# Altium PCB QTouch.PcbDoc
Units mm, origin at the board's own origin, x right, y up, seen from the top; angles counter-clockwise.
Board outline 69.64 x 63.83 mm, 2 copper layers (Top Layer, Bottom Layer); 28 components, 25 nets, 87 pads, 41 vias.
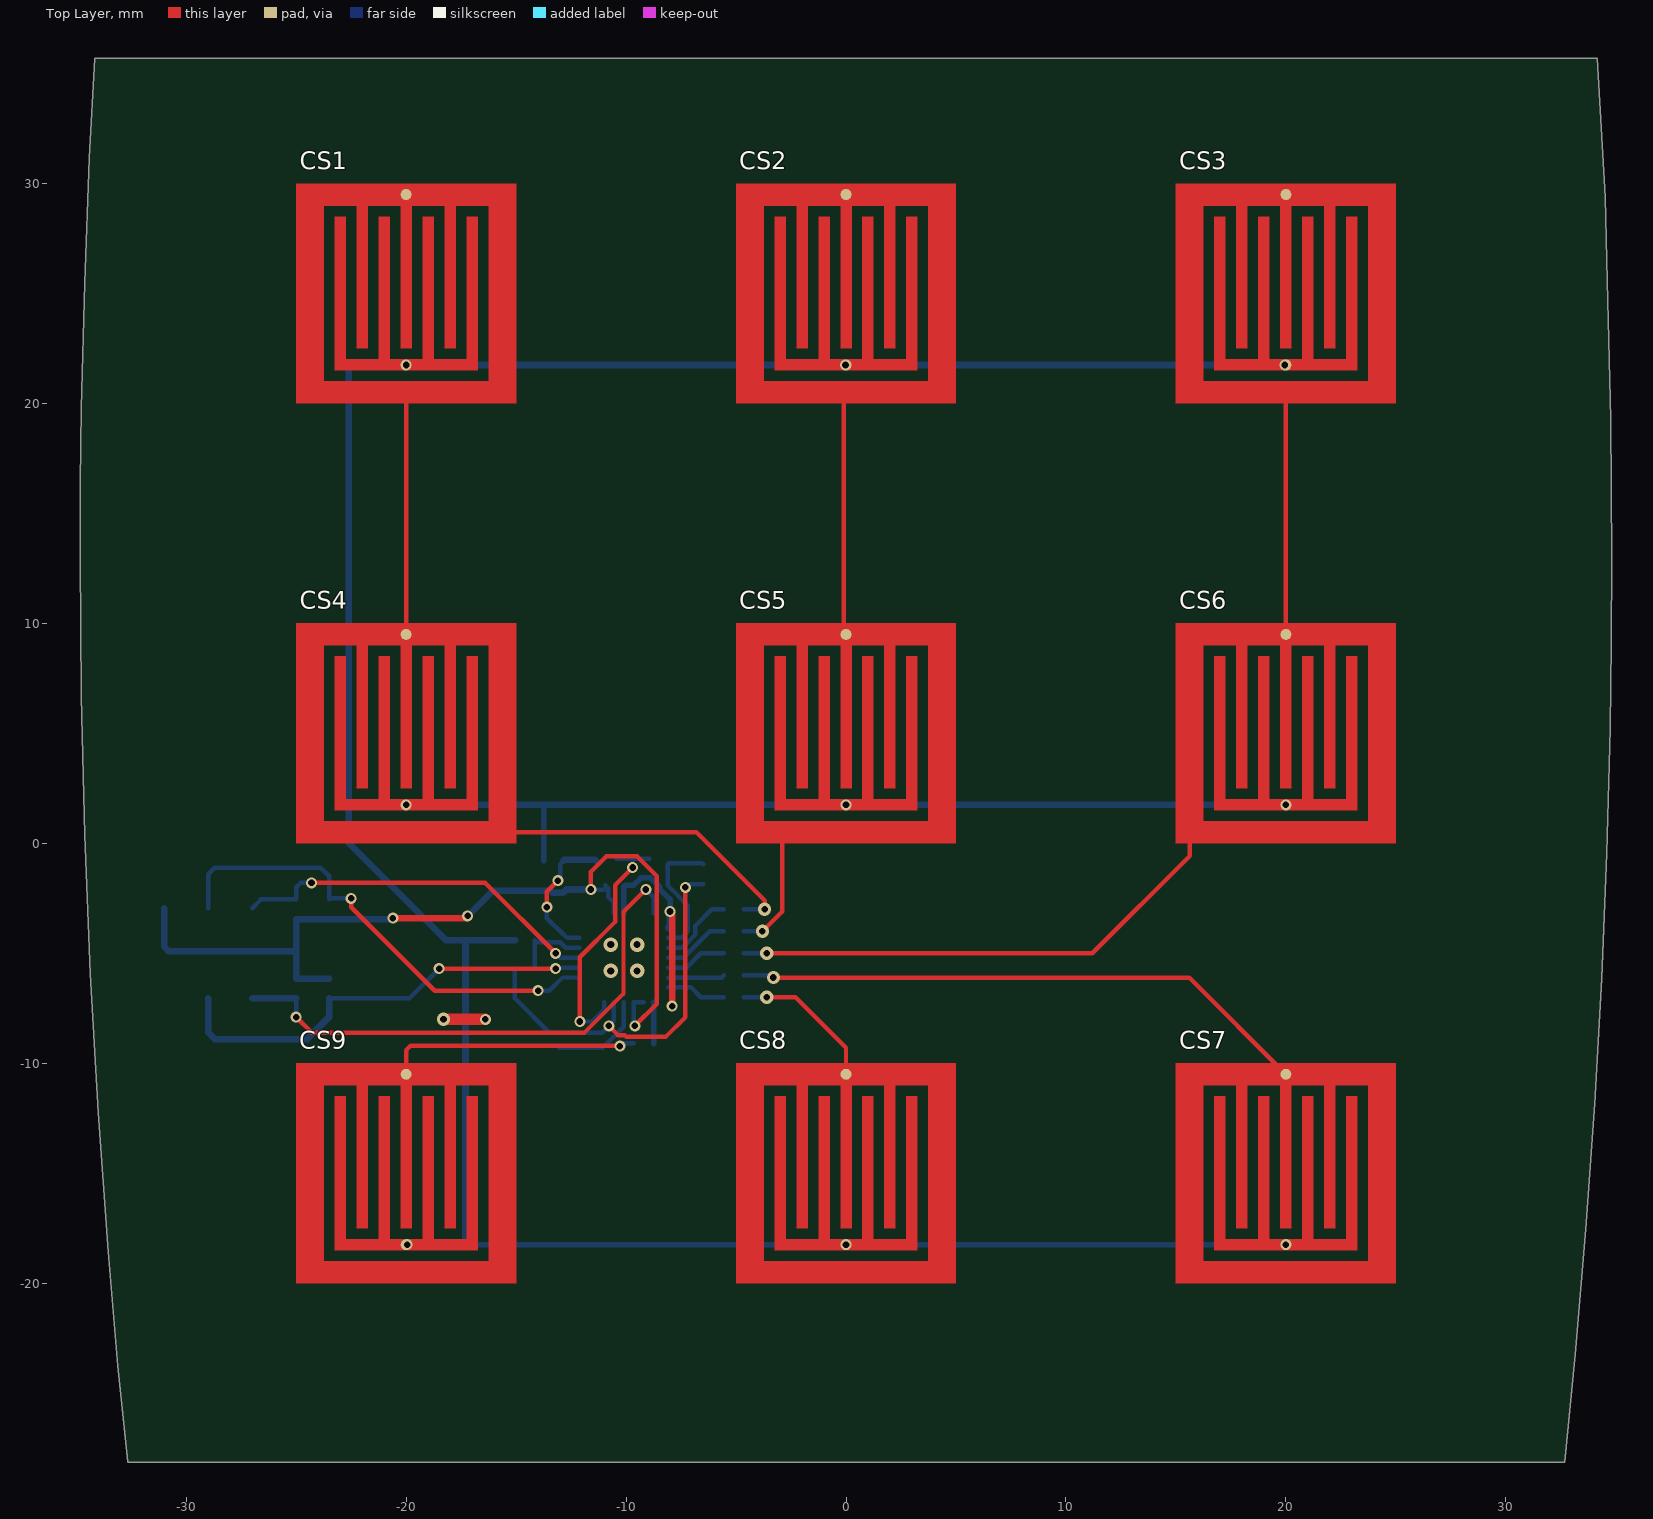
[diagram p0: Top Layer view]
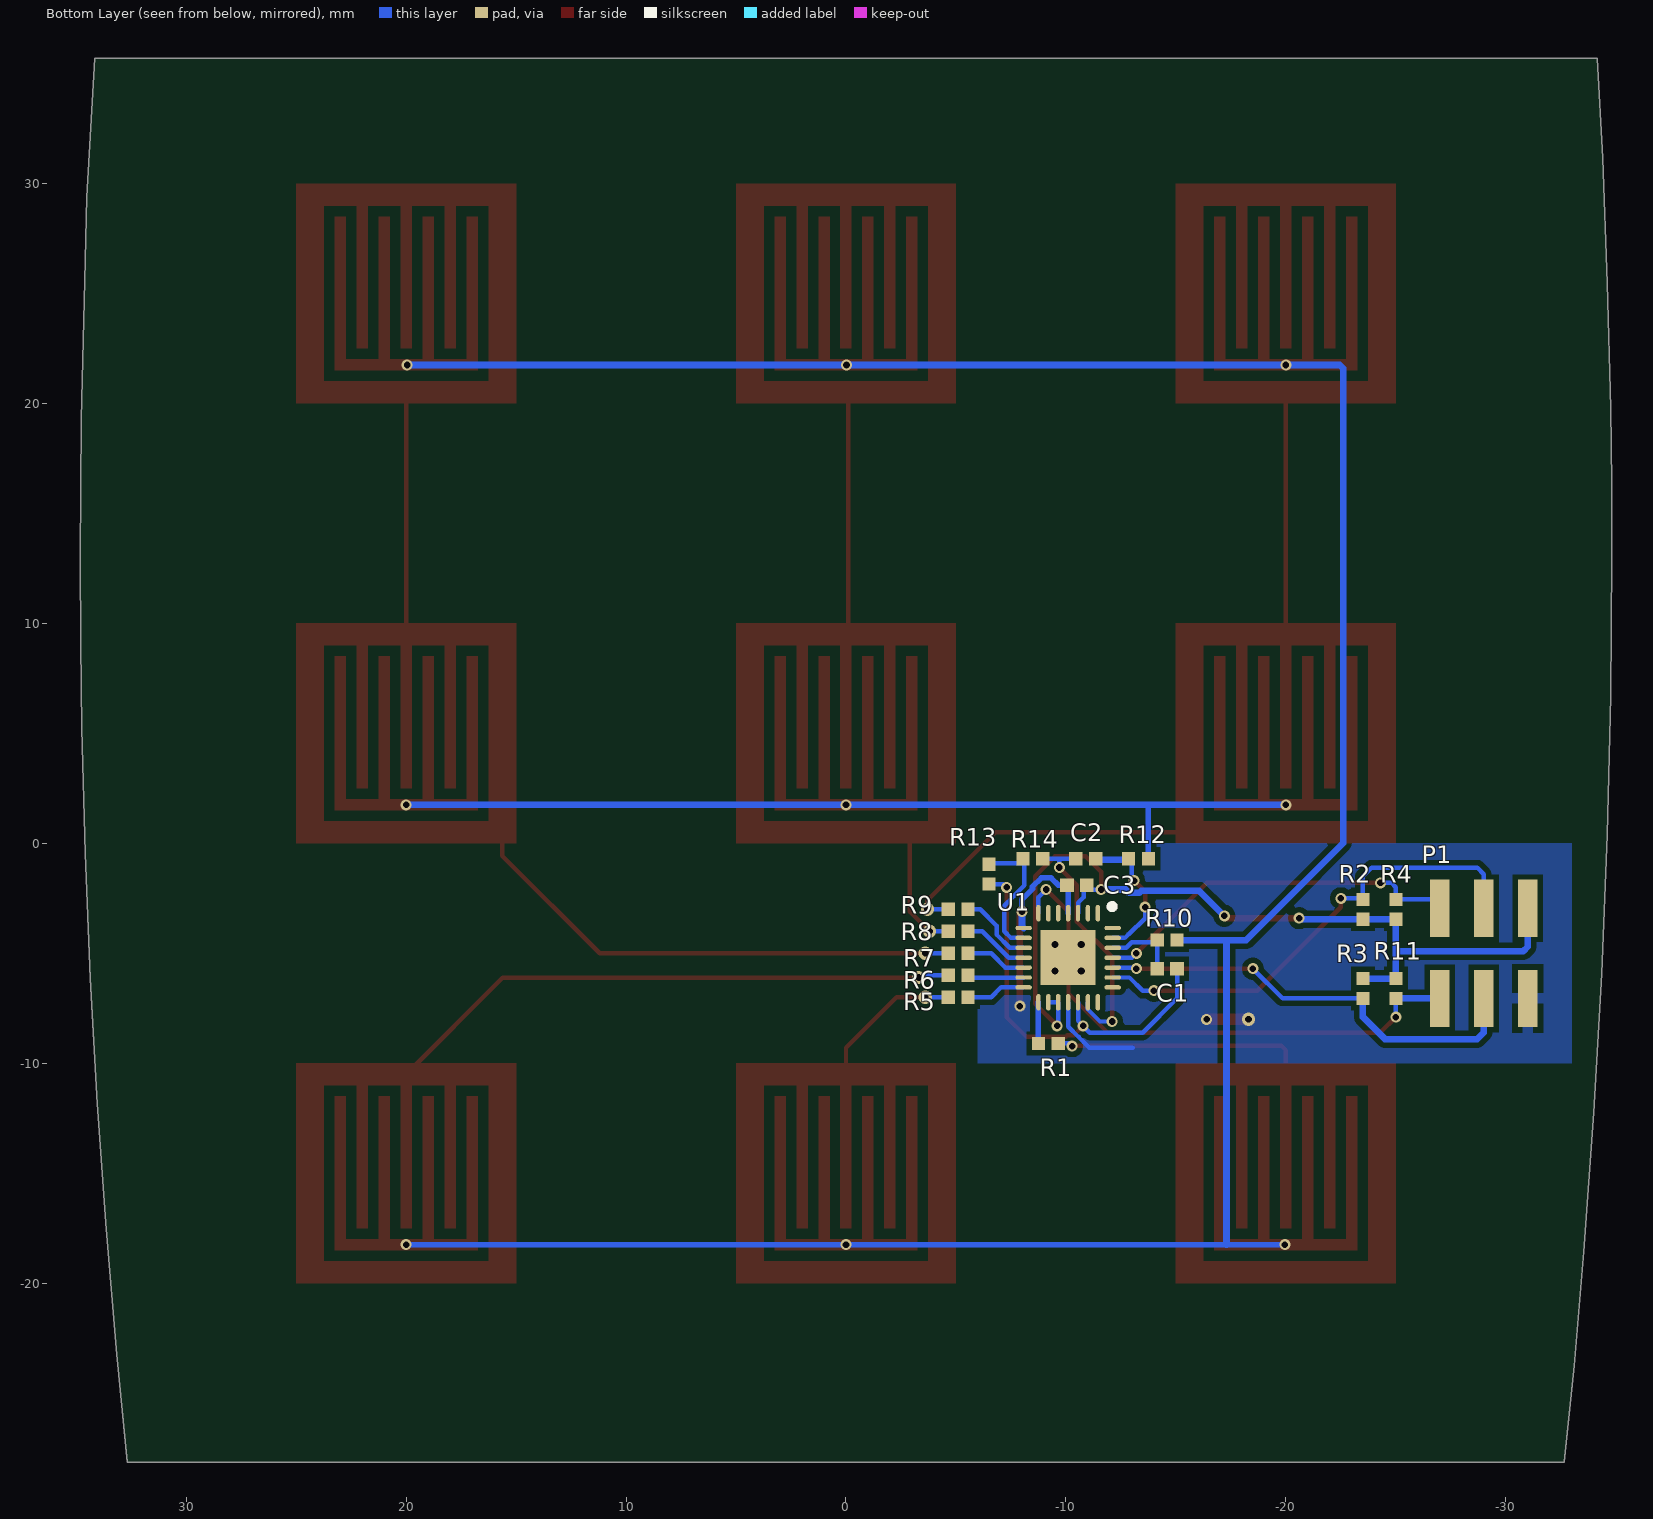
[diagram p1: Bottom Layer view, seen from below]
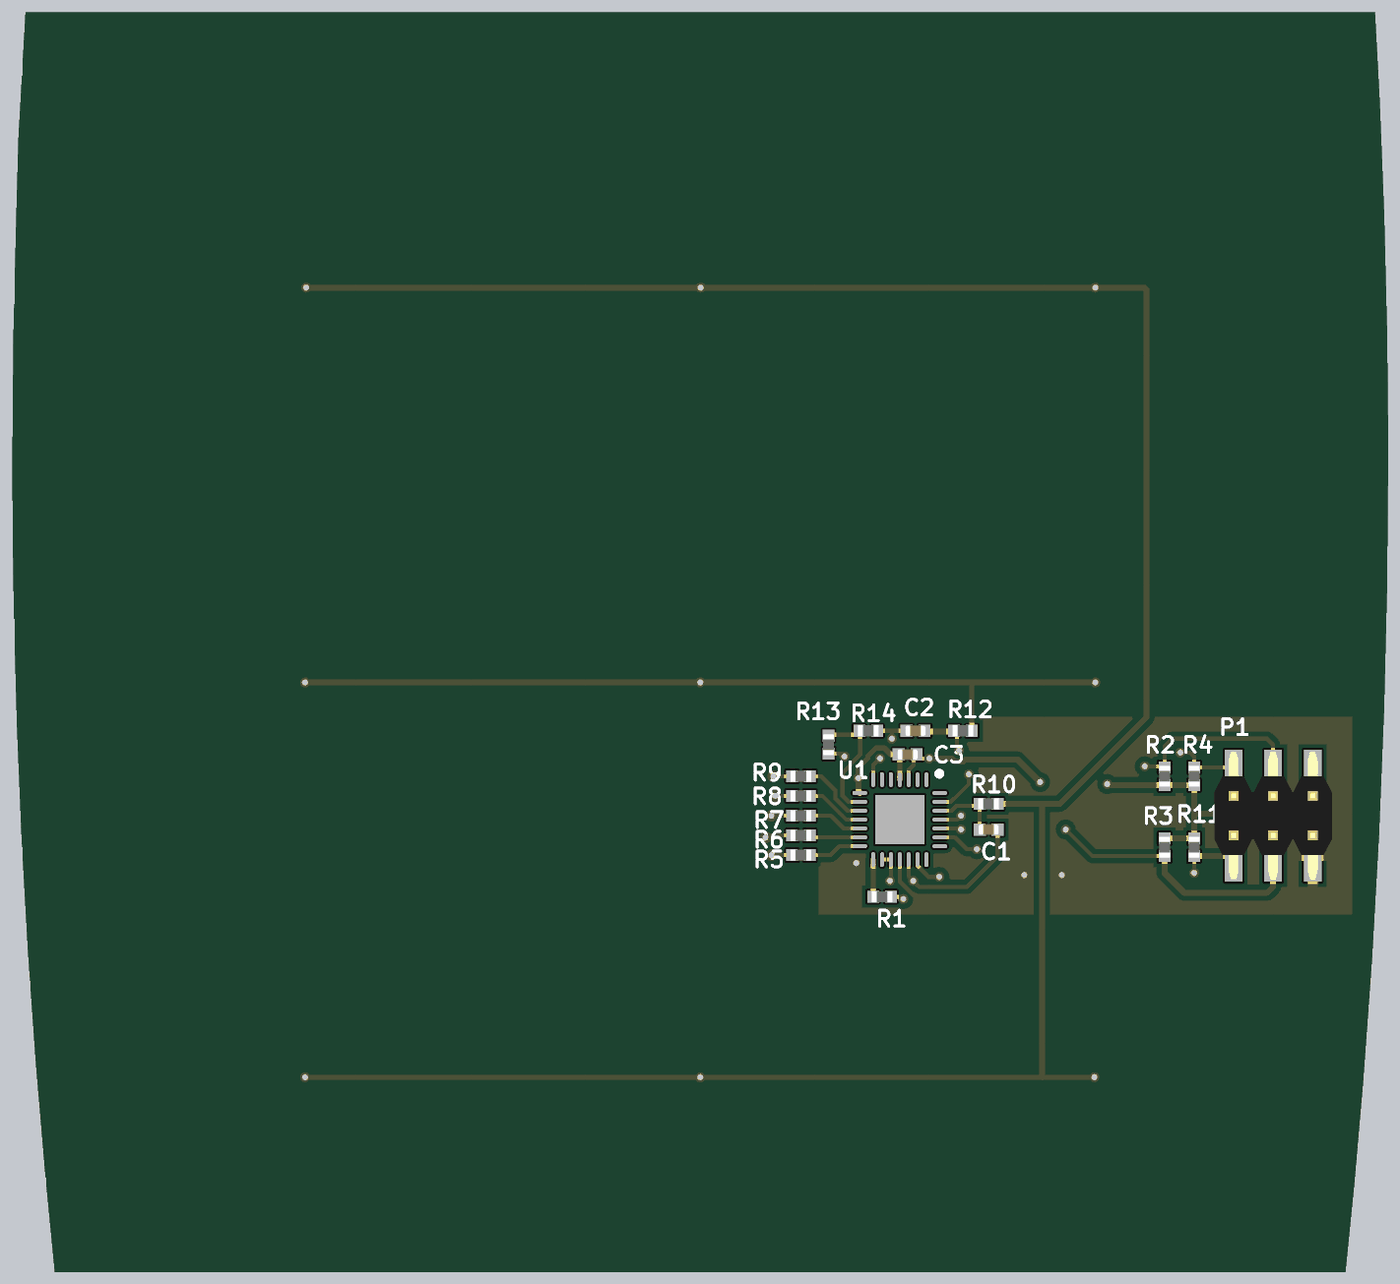
[diagram p2: 3D render of the assembled board from below, using the file's embedded part models]

## Layer stack, top to bottom
Top Layer: signal copper 0.0356
Dielectric: dielectric 0.32, FR-4, Dk 4.8
Bottom Layer: signal copper 0.0356

## Board outline
-34.008,-12.254 -34.364,-5.931 -34.618,0.386 -34.77,6.683 -34.821,12.979 -34.806,16.379 -34.761,19.78 -34.621,25.467 -34.398,31.159 -34.155,35.7 34.155,35.7 34.511,29.378 34.618,25.574 34.77,19.275 34.82,12.979 34.801,9.107 34.744,5.235 34.59,-0.452 34.353,-6.145 34.034,-11.841 33.633,-17.537 33.148,-23.231 32.674,-28.13 -32.664,-28.13 -32.664,-28.106 -33.1,-23.751 -33.55,-18.577

## Design rules (kind name [scope] priority, off if disabled: settings)
Clearance poly [(InPolygon)] p1: gap=0.254
Clearance [All] p2: gap=0.152
DiffPairsRouting [All] p1 off: maxlimit=0.254 minlimit=0.254 mostfreqgap=0.254 maxuncoupledlength=12.7
FanoutControl Fanout_BGA [IsBGA] p1 off: bgadir=Out bgaviamode=Centered fanoutstyle=Auto fanoutdirection=Alternating viagrid=0.025 // Fanout_BGA (Default Rule)
FanoutControl Fanout_LCC [IsLCC] p2 off: bgadir=Out bgaviamode=Centered fanoutstyle=Auto fanoutdirection=Alternating viagrid=0.025 // Fanout_LCC (Default Rule)
FanoutControl Fanout_SOIC [IsSOIC] p3 off: bgadir=Out bgaviamode=Centered fanoutstyle=Auto fanoutdirection=Alternating viagrid=0.025 // Fanout_SOIC (Default Rule)
FanoutControl Fanout_Small [(CompPinCount < 5)] p4 off: bgadir=Out bgaviamode=Centered fanoutstyle=Auto fanoutdirection=OutThenIn viagrid=0.025 // Fanout_Small (Default Rule)
FanoutControl Fanout_Default [All] p5 off: bgadir=Out bgaviamode=Centered fanoutstyle=Auto fanoutdirection=Alternating viagrid=0.025 // Fanout_Default (Default Rule)
HoleSize [All] p1 off: absolutevalues=TRUE maxlimit=2.54 minlimit=0.025 maxpercent=80.000 minpercent=20.000
HoleSize Testpoint [All] p2 off: absolutevalues=TRUE maxlimit=2.54 minlimit=0.025 maxpercent=80.000 minpercent=20.000
HoleSize TestPointUsage [All] p3 off: absolutevalues=TRUE maxlimit=2.54 minlimit=0.025 maxpercent=80.000 minpercent=20.000
LayerPairs [All] p1 off: enforce=TRUE
MinimumSolderMaskSliver [All] p1 off: minsoldermaskwidth=0.254
PolygonConnect PolygonConnect_pad [(InPadClass('All Pads'))] p1: connectstyle=Relief reliefconductorwidth=0.5 reliefentries=4 polygonreliefangle="90 Angle"
PolygonConnect [All] p2: connectstyle=Direct reliefconductorwidth=0.762 reliefentries=4 polygonreliefangle="90 Angle"
RoutingCorners [All] p1 off: cornerstyle=45-Degree minsetback=2.54 maxsetback=2.54
RoutingLayers [All] p1 off: top layer_v5=TRUE bottom layer_v5=TRUE
RoutingPriority [All] p1 off: routingpriority=0
RoutingTopology [All] p1 off: topology=Shortest
RoutingVias [All] p1: holewidth=0.3 width=0.6 viastyle="Through Hole" minholewidth=0.3 minwidth=0.5 maxholewidth=2 maxwidth=3
ShortCircuit [All] p1: allowed=TRUE
SilkToSilkClearance [All] p1 off: silktosilkclearance=0.254
SilkscreenOverComponentPads [All] p1 off: minsilkscreentomaskgap=0.051
SolderMaskExpansion [All] p1: expansion=0.102
ViasUnderSMD ViasUnderSMD_ic35 [(InComponent('IC35'))] p1: allowed=TRUE
ViasUnderSMD [All] p2: allowed=FALSE
Width [All] p1: maxlimit=5.08 minlimit=0.203 preferedwidth=0.203
12 further rules are at their usual default settings.

## Components (designator, comment, footprint, x,y, rotation, side; value= is the part's Value field where it differs from the comment)
C1 "4.7nF" CAPC1005X55N -14.6,-5.7 r0 bottom
C2 "4.7nF" CAPC1005X55N -10.9,-0.7 r180 bottom
C3 "100nF" CAPC1005X55N -10.5,-1.9 r180 bottom
CS1 "QMatrix Button" ? -20,25 r0 top
CS2 "QMatrix Button" ? 0,25 r0 top
CS3 "QMatrix Button" ? 20,25 r0 top
CS4 "QMatrix Button" ? -20,5 r0 top
CS5 "QMatrix Button" ? 0,5 r0 top
CS6 "QMatrix Button" ? 20,5 r0 top
CS7 "QMatrix Button" ? 20,-15 r0 top
CS8 "QMatrix Button" ? 0,-15 r0 top
CS9 "QMatrix Button" ? -20,-15 r0 top
P1 "Header 6" "header 2X3" -29,-5 r0 bottom
R1 "1k" RESC1005X40N -9.2,-9.1 r180 bottom
R2 "10k" RESC1005X40N -23.5,-3 r270 bottom
R3 "10k" RESC1005X40N -23.5,-6.6 r90 bottom
R4 "100k" RESC1005X40N -25,-3 r270 bottom
R5 "1k" RESC1005X40N -5.1,-7 r0 bottom
R6 "1k" RESC1005X40N -5.1,-6 r0 bottom
R7 "1k" RESC1005X40N -5.1,-5 r0 bottom
R8 "1k" RESC1005X40N -5.1,-4 r0 bottom
R9 "1k" RESC1005X40N -5.1,-3 r0 bottom
R10 "1k" RESC1005X40N -14.6,-4.4 r180 bottom
R11 "100k" RESC1005X40N -25,-6.6 r90 bottom
R12 "1k" RESC1005X40N -13.3,-0.7 r180 bottom
R13 "1M" RESC1005X40N -6.5,-1.4 r270 bottom
R14 "1M" RESC1005X40N -8.5,-0.7 r180 bottom
U1 "AT42QT2160-MMU" 28M1_N -10.1,-5.2 r270 bottom

## Footprints (in the part's own frame and the unit in brackets; to place one, negate y for a bottom-side part, rotate by r counter-clockwise, add the part's x,y. Pads: shape width x height; smd on the part's side, far side on the other; paste and mask are expansions set on the pad)
28M1_N [mm] "QFN, 28-Leads, Body 4x4mm, Pitch 0.45mm, IPC Medium Density"
  oval 0.75x0.2 smd: 1(-2.025,1.35) 2(-2.025,0.9) 3(-2.025,0.45) 4(-2.025,0) 5(-2.025,-0.45) 6(-2.025,-0.9) 7(-2.025,-1.35) 15(2.025,-1.35) 16(2.025,-0.9) 17(2.025,-0.45) 18(2.025,0) 19(2.025,0.45) 20(2.025,0.9) 21(2.025,1.35)
  oval 0.2x0.75 smd: 8(-1.35,-2.025) 9(-0.9,-2.025) 10(-0.45,-2.025) 11(0,-2.025) 12(0.45,-2.025) 13(0.9,-2.025) 14(1.35,-2.025) 22(1.35,2.025) 23(0.9,2.025) 24(0.45,2.025) 25(0,2.025) 26(-0.45,2.025) 27(-0.9,2.025) 28(-1.35,2.025)
  rect 2.5x2.5 smd: 29(0,0)
  silkscreen extent -2.45,1.88 -2.2,2.12, body extent -2.02,-2.02 2.02,2.02, height 1
CAPC1005X55N [mm] "Chip Capacitor, Body 1.0x0.55mm, IPC Medium Density"
  rect 0.62x0.62 smd: 1(-0.45,0) 2(0.45,0)
  body extent -0.52,-0.27 0.53,0.28, height 0.55
"header 2X3" [mm]
  rect 0.9x2.6 smd: 1(-2,-2.05) 2(-2,2.05) 3(0,-2.05) 4(0,2.05) 5(2,-2.05) 6(2,2.05)
  body extent -2.97,-3.25 2.98,3.25, height 6.5
RESC1005X40N [mm] "Chip Resistor, EIA 0402, Metric 1005, Body 1.0x0.5mm, IPC Medium Density"
  rect 0.6x0.6 smd: 1(-0.45,0) 2(0.45,0)
  body extent -0.52,-0.27 0.53,0.28, height 0.4
? [mm]
  round 0.5 smd paste-0.25: X(0,4.5) Y(0,-3.25)
  Top Layer region: -3.25,-3.5 -3.25,3.5 -2.75,3.5 -2.75,-3 -1.25,-3 -1.25,3.5 -0.75,3.5 -0.75,-3 0.75,-3 0.75,3.5 1.25,3.5 1.25,-3 2.75,-3 2.75,3.5 3.25,3.5 3.25,-3.5
  Top Layer region: -5,-5 5,-5 5,5 -5,5 -5,-5 -3.75,-4 -3.75,4 -2.25,4 -2.25,-2.5 -1.75,-2.5 -1.75,4 -0.25,4 -0.25,-2.5 0.25,-2.5 0.25,4 1.75,4 1.75,-2.5 2.25,-2.5 2.25,4 3.75,4 3.75,-4 -3.75,-4

## Part data
C1 C2: library part CC0402_4.7NF_16V_10%_X7R, "Non-polarised capacitor"
C3: library part CC0402_100NF_16V_10%_X7R, "Non-polarised capacitor"
CS1 CS2 CS3 CS4 CS5 CS6 CS7 CS8 CS9: library part QMatrixButton
P1: "Header, 6-Pin"
R1 R5 R6 R7 R8 R9 R10 R12: library part R0402_1K_1%_0.0625W_100PPM, "Resistor - 1%"
R2 R3: library part R0402_10K_1%_0.0625W_100PPM, "Resistor - 1%"
R4 R11: library part R0402_100K_1%_0.0625W_100PPM, "Resistor - 1%"
R13 R14: library part R0402_1M_1%_0.0625W_100PPM, "Resistor - 1%"
U1: "QSlide 16-key QMatrix Sensor IC, 28-Pin VQFN"

## Via types
v1: diameter 0.5, hole 0.3, Top Layer to Bottom Layer, tented both sides, 31 vias
v2: diameter 0.6, hole 0.3, Top Layer to Bottom Layer, tented both sides, 6 vias
v3: diameter 0.66, hole 0.33, Top Layer to Bottom Layer, tented both sides, 4 vias

## Nets (pads, with @x,y where several pads share a name; then routed paths per layer and width w, separated by ;. In a path a pad name is that pad's centre, name@x,y a point inside that pad or via, vN(x,y) a via of type N, cw(c..) or ccw(c..) an arc to the next point about the centre after c; other vN are vias at no path point)
\Q\T\_\C\H\A\N\G\E\: P1.6 R11.1 U1.7 | length 25.1
  Top Layer w0.203: v1(-25,-7.9) -24.296,-8.604 -11.891,-8.604 -10.116,-6.829 -10.116,-3.116 v1(-9.1,-2.1)
  Bottom Layer w0.203: v1(-25,-7.9) R11.1 ; v1(-9.1,-2.1) -8.75,-2.45 U1.7
  Bottom Layer w0.3: P1.6 R11.1
GND: C3.1 P1.2 U1.4 U1.8 U1.18 | length 16
  Top Layer w0.3: v1(-8,-3.1) -7.9,-3.2 v1(-7.9,-7.4)
  Top Layer w0.508: v2(-18.3,-8) v1(-16.4,-8)
  Bottom Layer w0.204: -13.039,-9.3 -11.071,-9.3 -10.804,-9.034 -10.575,-8.804 -10.104,-8.334 -10.104,-8.091 -10.1,-8.087 U1.18
  Bottom Layer w0.254: U1.4 -10.1,-1.95 C3.1 -9.649,-1.9 -9.319,-1.571 -8.881,-1.571 -8.481,-1.97 -8.481,-2.071 -8,-2.552 v1(-8,-3.1)
  Bottom Layer w0.3: U1.8 -8,-3.775 v1(-8,-3.1)
NetC1_1: C1.1 R13.2 U1.19 | length 18.4
  Top Layer w0.204: v1(-10.784,-8.3) -10.367,-8.717 -10.07,-8.717 -9.982,-8.804 -8.204,-8.804 -7.3,-7.9 v1(-7.3,-2)
  Bottom Layer w0.204: C1.1 -15.05,-7.05 -13.496,-8.604 -11.088,-8.604 v1(-10.784,-8.3) -10.55,-8.066 U1.19 ; v1(-7.3,-2) -7.15,-1.85 R13.2
NetC1_2: C1.2 R10.1 U1.26 | length 3.5
  Bottom Layer w0.204: C1.2 R10.1 -14.054,-4.496 -12.991,-4.496 -12.737,-4.75 U1.26
NetC2_1: C2.1 R14.2 U1.20 | length 11.5
  Top Layer w0.204: v1(-12.1,-8.1) -12.1,-5.174 -10.5,-3.574 -10.5,-1.9 v1(-9.7,-1.1)
  Bottom Layer w0.204: v1(-12.1,-8.1) -11.549,-8.1 -11,-7.551 U1.20 ; C2.1 -9.7,-0.7 ; v1(-9.7,-1.1) -9.7,-0.7 ; R14.2 -9.7,-0.7
NetC2_2: C2.2 R12.1 U1.27 | length 6.3
  Top Layer w0.203: v1(-13.6,-2.9) -13.6,-2.2 v1(-13.1,-1.7)
  Bottom Layer w0.203: v1(-13.6,-2.9) -13.6,-3.4 -12.86,-4.14 -12.844,-4.14 -12.683,-4.3 U1.27 ; v1(-13.1,-1.7) -13,-1.6 -13,-0.95 R12.1@-12.85,-0.8
  Bottom Layer w0.3: R12.1@-12.85,-0.8 -12.798,-0.748 -11.402,-0.748 C2.2@-11.35,-0.8
NetR1_1: R1.1 U1.15 | length 1.9
  Bottom Layer w0.254: R1.1 U1.15
NetR5_1: R5.1 U1.14 | length 2.7
  Bottom Layer w0.204: U1.14 -7.05,-6.55 -6.6,-7 R5.1
NetR6_1: R6.1 U1.13 | length 2.6
  Bottom Layer w0.204: U1.13 -5.65,-6.1 R6.1
NetR7_1: R7.1 U1.12 | length 2.8
  Bottom Layer w0.204: U1.12 -7.25,-5.65 -6.6,-5 R7.1
NetR8_1: R8.1 U1.11 | length 3
  Bottom Layer w0.203: U1.11 -7.393,-5.2 -6.193,-4 R8.1
NetR9_1: R9.1 U1.10 | length 3.5
  Bottom Layer w0.204: U1.10 -7.447,-4.75 -6.844,-4.147 -6.844,-3.744 -6.1,-3 R9.1
NetR13_1: R13.1 R14.1 U1.9 | length 6.1
  Bottom Layer w0.203: U1.9 -7.5,-4.3 -7.2,-4 -7.2,-2.832 -7.619,-2.413 -7.619,-2.394 -8.1,-1.913 -8.1,-0.95 -8.05,-0.9 -6.55,-0.9 R13.1
Q\T\_\R\S\T\: P1.5 R4.1 U1.25 | length 17.1
  Top Layer w0.203: v1(-24.3,-1.8) -16.4,-1.8 v1(-13.2,-5)
  Bottom Layer w0.203: R4.1 -25,-2 -24.8,-1.8 v1(-24.3,-1.8) ; v1(-13.2,-5) -13.004,-5.196 -12.129,-5.196 U1.25
  Bottom Layer w0.204: P1.5 -26.6,-2.55 R4.1
QT_SCL: P1.4 R3.1 U1.24 | length 20.4
  Top Layer w0.203: v1(-18.5,-5.7) v1(-13.2,-5.7)
  Bottom Layer w0.203: R3.1 -19.85,-7.05 v1(-18.5,-5.7) ; v1(-13.2,-5.7) -13.15,-5.65 U1.24
  Bottom Layer w0.3: P1.4 -29,-8.6 -28.7,-8.9 -24.5,-8.9 -23.5,-7.9 R3.1
QT_SDA: P1.3 R2.1 U1.23 | length 22
  Top Layer w0.203: v1(-22.5,-2.5) -22.5,-2.903 -18.703,-6.7 v1(-14,-6.7)
  Bottom Layer w0.203: R2.1 -23.45,-2.5 v1(-22.5,-2.5) ; v1(-14,-6.7) -13.487,-6.7 -12.887,-6.1 U1.23
  Bottom Layer w0.204: P1.3 -29,-1.4 -28.7,-1.1 -23.9,-1.1 -23.5,-1.5 R2.1
VCC: C3.2 P1.1 R2.2 R3.2 R4.2 R11.2 U1.3 U1.16 U1.17 | length 41.3
  Top Layer w0.203: v1(-11.6,-2.1) -11.6,-1.3 -10.896,-0.596 -9.491,-0.596 -8.596,-1.491 -8.596,-7.296 v1(-9.6,-8.3)
  Top Layer w0.3: v1(-20.6,-3.4) -17.3,-3.4 v1(-17.2,-3.3)
  Bottom Layer w0.203: -11.9,-2.1 v1(-11.6,-2.1) C3.2@-11.013,-2.1 ; C3.2 -10.8,-2.05 -10.8,-2.45 -10.55,-2.7 U1.3 ; v1(-9.6,-8.3) -9.65,-8.25 U1.17 U1.16
  Bottom Layer w0.3: P1.1 -31,-4.7 -30.8,-4.9 -25,-4.9 ; R3.2 R11.2 -25,-4.9 ; v1(-20.6,-3.4) -20.65,-3.45 R2.2 R4.2 -25,-4.9 ; v1(-17.2,-3.3) -16.052,-2.152 -13.429,-2.152 -13.329,-2.252 -12.871,-2.252 -12.719,-2.1 -11.9,-2.1
X0: CS1.X CS4.X R9.2 | length 64.7
  Top Layer w0.204: -24.5,0.625 -24.5,9.2 -24.2,9.5 CS4.X -20,20.2 -20.4,20.6 -24,20.6 -24.4,21 -24.4,29.3 -24.2,29.5 CS1.X ; -24.375,0.5 -6.8,0.5 -3.7,-2.6 v2(-3.7,-3)
  Bottom Layer w0.204: R9.2 v2(-3.7,-3)
X1: CS2.X CS5.X R8.2 | length 48.5
  Top Layer w0.204: v2(-3.8,-4) -2.9,-3.1 -2.9,0.2 -3.1,0.4 -4,0.4 -4.375,0.775 -4.375,9.025 -3.9,9.5 CS5.X -0.1,9.6 -0.1,20.5 -4.2,20.5 -4.5,20.8 -4.5,29.2 -4.2,29.5 CS2.X
  Bottom Layer w0.204: R8.2 v2(-3.8,-4)
X2: CS3.X CS6.X R7.2 | length 64.6
  Top Layer w0.204: v2(-3.6,-5) 11.2,-5 15.625,-0.575 15.625,9.125 16,9.5 CS6.X 20,20.4 19.9,20.5 16,20.5 15.6,20.9 15.6,29 16.1,29.5 CS3.X
  Bottom Layer w0.204: R7.2 v2(-3.6,-5)
X3: CS7.X R6.2 | length 26.5
  Top Layer w0.204: v2(-3.3,-6.1) 15.6,-6.1 CS7.X
  Bottom Layer w0.204: R6.2 -3.4,-6 v2(-3.3,-6.1)
X4: CS8.X R5.2 | length 6.8
  Top Layer w0.204: v2(-3.6,-7) -2.3,-7 0,-9.3 CS8.X
  Bottom Layer w0.204: R5.2 v2(-3.6,-7)
X5: CS9.X R1.2 | length 11.6
  Top Layer w0.204: CS9.X -20,-9.4 -19.8,-9.2 -10.3,-9.2 v1(-10.279,-9.221)
  Bottom Layer w0.204: v1(-10.279,-9.221) -10.279,-9.179 -10.2,-9.1 R1.2
Y0: CS1.Y CS2.Y CS3.Y CS7.Y CS8.Y CS9.Y R10.2 | length 127.4
  Top Layer w0.254: CS9.Y v1(-19.95,-18.25)
  Bottom Layer w0.254: v1(-19.95,-18.25) -17.3,-18.25 v1(0,-18.25) ; v1@0.05,-18.25 v1(20,-18.25)
  Bottom Layer w0.3: -17.3,-18.25 -17.3,-4.4 ; R10.2 -17.3,-4.4 ; v1(19.95,21.75) v1(-0.025,21.75) v1(-20,21.75) -22.45,21.75 -22.6,21.6 -22.6,0 -18.2,-4.4 -17.3,-4.4
Y1: CS4.Y CS5.Y CS6.Y R12.2 | length 42.6
  Bottom Layer w0.254: -13.8,1.75 -13.75,1.7 R12.2@-13.75,-0.8
  Bottom Layer w0.3: v1(-20,1.75) -13.8,1.75 v1(0,1.75) v1(20,1.75)
pads on no net: U1.1 U1.2 U1.5 U1.6 U1.21 U1.22 U1.28 U1.29
copper on no net:
  other v3: -10.7,-5.8 -9.5,-5.8 -10.7,-4.6 -9.5,-4.6

## Polygon pours and split planes (outlines as drawn)
GND on Bottom Layer "BottL-GND" (solid, pour order 2): -33,0 -6,0 -6,-10 -33,-10

## Silkscreen, mask and mechanical layers (free items; w line width, h text height)
Mechanical 1:
  lines w0.5: -32.664,-28.13 29.812,-28.13 32.674,-28.13 33.148,-23.231 33.633,-17.537 34.034,-11.841 34.353,-6.145 34.59,-0.452 34.744,5.235 34.801,9.107 34.82,12.979 34.77,19.275 34.618,25.574 34.511,29.378 34.155,35.7 -34.155,35.7 -34.398,31.159 -34.621,25.467 -34.761,19.78 -34.806,16.379 -34.821,12.979 -34.77,6.683 -34.618,0.386 -34.364,-5.931 -34.008,-12.254 -33.55,-18.577 -33.1,-23.751 -32.664,-28.106
Mechanical 2:
  lines w0.127: -34.385,30.523 -28.685,30.523 ; -31.535,27.673 -31.535,33.373 ; 28.363,30.523 34.063,30.523 ; 31.213,27.673 31.213,33.373
Mechanical 7:
  circle w0.127: c-31.535,30.523 r1.6
  circle w0.127: c31.213,30.523 r1.6